# Altium PCB ShareBoard - i.MXRT1050_REV3.PcbDoc (part 3 of 3)
Units mil, origin at the board's own origin, x right, y up, seen from the top; angles counter-clockwise.
Board outline 1968.5 x 1968.5 mil, 4 copper layers (Top Layer, GND, POWER, Bottom Layer), stack 30.635 mil thick; 194 components, 200 nets, 998 pads, 473 vias.
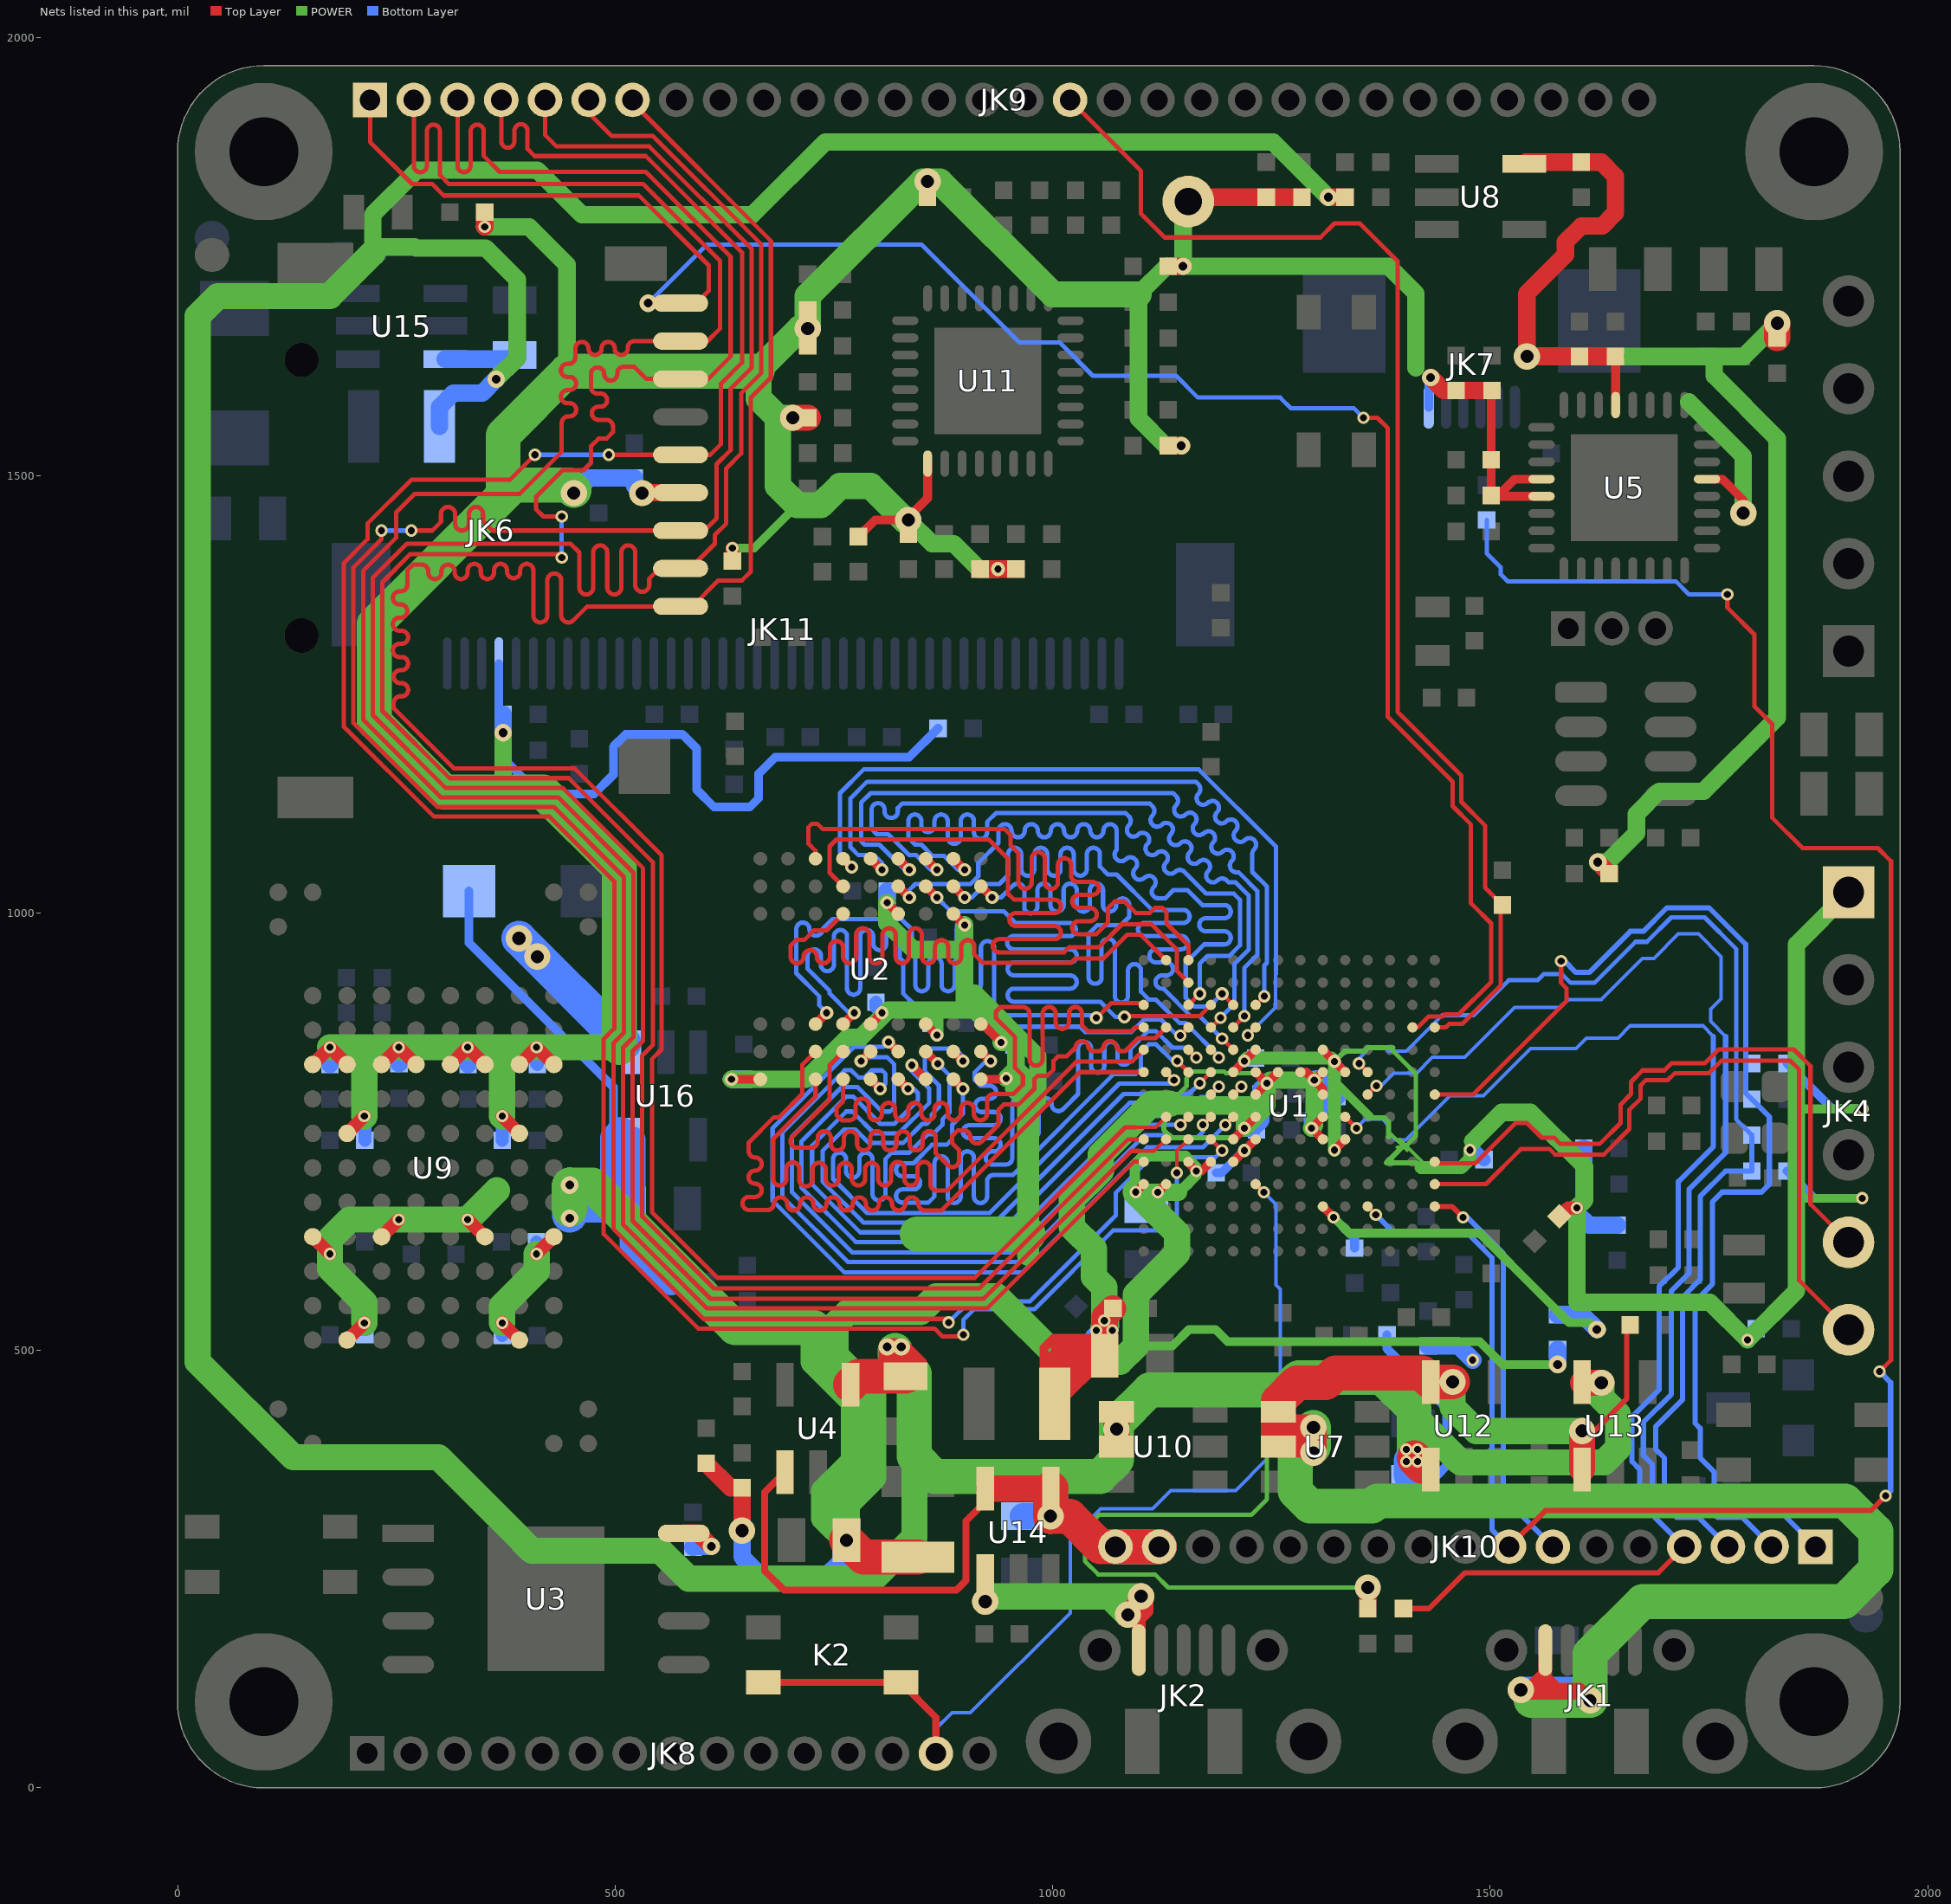
[diagram p5: the nets of this part, all layers, seen from the top]

## Via types
v1: diameter 14, hole 8, Top Layer to Bottom Layer, 293 vias
v2: diameter 20, hole 10, Top Layer to Bottom Layer, 69 vias
v3: diameter 15, hole 8, Top Layer to Bottom Layer, 53 vias
v4: diameter 30, hole 15, Top Layer to Bottom Layer, 52 vias
v5: diameter 16, hole 8, Top Layer to Bottom Layer, 3 vias
v6: diameter 40, hole 20, Top Layer to Bottom Layer, 2 vias
v7: diameter 50, hole 25, Top Layer to Bottom Layer, 1 vias

## Nets (pads, with @x,y where several pads share a name; then routed paths per layer and width w, separated by ;. In a path a pad name is that pad's centre, name@x,y a point inside that pad or via, vN(x,y) a via of type N, cw(c..) or ccw(c..) an arc to the next point about the centre after c; other vN are vias at no path point) (continued)
SDRAM_A12: U1.A3 U2.G1 | length 880.2
  Top Layer w5: U2.G1@729.01,1061.98 729.01,1070.99 721,1079 721,1098 725,1102 731,1102 737,1096 945,1096 952,1089 952,1077 961,1068 961,1035 ccw(c968.5,1035) 976,1035 976,1062 cw(c983.5,1062) 991,1062 991,1035 ccw(c998.5,1035) 1006,1035 1006,1055 cw(c1013.5,1055) 1021,1055 1021,1043 ccw(c1028.5,1043) 1029.88,1035.63 1045.37,1035.63 cw(c1045.37,1028.13) 1045.37,1020.63 1029.88,1020.63 ccw(c1029.88,1013.13) 1029.88,1005.63 1042.87,1005.63 cw(c1042.87,998.13) 1042.87,990.63 1029.88,990.63 ccw(c1029.88,983.13) 1029.88,975.63 1049.63,975.63 1063,989 1063,1005.23 1070.77,1013 1082,1013 1095,1000 1111,1000 1117,1006 1125,1006 1130,1001 1130,988 1155.18,962.82 U1.A3@1155.18,946
SDRAM_BA0: U1.C1 U2.G7 | length 882.9
  Top Layer w5: v3(1050,880) 1067,897 1101.82,897 U1.C1@1104,894.82
  Top Layer w10: U2.G7@729.01,873.01 v3(741.8,885.8)
  Bottom Layer w5: v3(741.8,885.8) 733,894.61 733,905 707,931 707,981.5 cw(c714.5,981.5) 722,981.5 ccw(c729.5,981.5) 737,981.5 748.5,993 827,993 839,981 839,957 843,953 843,918 ccw(c850.5,918) 858,918 858,942 cw(c865.5,942) 873,942 873,918 ccw(c880.5,918) 888,918 888,942.5 cw(c895.5,942.5) 903,942.5 903,918 ccw(c910.5,918) 918,918 918,960.3 cw(c925.5,960.3) 933,960.3 933,895 945,883 1047,883 v3(1050,880)
SDRAM_BA1: U1.F1 U2.G8 | length 880.4
  Top Layer w5: U2.G8@729.01,841.51 714,826.5 714,793 687.5,766.5 681.5,766.5 652.5,737.5 652.5,728.02 ccw(c660,728.02) 660,720.52 cw(c660,713.02) 660,705.52 ccw(c660,698.02) 660,690.52 cw(c660,683.02) 660,675.52 653,675.52 ccw(c653,668.02) 653,660.52 674,660.52 ccw(c674,668.02) 681.48,667.48 cw(c688.98,667.48) 696.48,667.48 ccw(c703.98,667.48) 711.48,667.48 cw(c718.98,667.48) 726.48,667.48 ccw(c733.98,667.48) 741.48,667.48 cw(c748.98,667.48) 756.48,667.48 ccw(c763.98,667.48) 771.48,667.48 cw(c778.98,667.48) 786.48,667.48 ccw(c793.98,667.48) 801.48,667.48 cw(c808.98,667.48) 816.48,667.48 ccw(c823.98,667.48) 831.48,667.48 cw(c838.98,667.48) 846.48,667.48 ccw(c853.98,667.48) 853.45,660 873,660 1031.05,818.05 U1.F1@1104,818.05
SDRAM_C\A\S\: U1.D3 U2.F7 | length 880
  Top Layer w5: v1(1146,860) U1.D3@1155.18,869.23
  Top Layer w10: U2.F7@760.5,873.01 v3(773.3,885.8)
  Bottom Layer w5: v3(773.3,885.8) 767.2,885.8 745,908 745,911 720,936 720,951 cw(c727.5,951) 735,951 735,941 ccw(c742.5,941) 750,941 750,973 cw(c757.5,973) 765,973 765,914 ccw(c772.5,914) 780,914 780,973 cw(c787.5,973) 795,973 795,965 ccw(c802.5,965) 810,965 810,974 cw(c817.5,974) 825,974 825,949 829,945 829,908 841,896 914,896 940,870 1031,870 1037,864 1090,864 1104,878 1124,878 1142,860 v1(1146,860)
SDRAM_C\S\: U1.E1 U2.G9 | length 880.2
  Top Layer w5: 695.5,695 695.5,707.4 cw(c703,707.4) 710.5,707.4 710.5,695 ccw(c718,695) 725.5,695 725.5,707 cw(c733,707) 740.5,707 740.5,696 ccw(c748,696) 755.5,696 755.5,707 cw(c763,707) 770.5,707 770.5,696 ; 695.5,696 cw(c688,696) 680.5,696 680.5,741.5 729.01,790.01 U2.G9@729.01,810.02 ; 770.5,695 770.5,696 ; 785.5,695 785.5,707 cw(c793,707) 800.5,707 800.5,696 ccw(c808,696) 815.5,696 ; 785.5,696 cw(c778,696) 770.5,696 ; 815.5,695 815.5,708 cw(c823,708) 830.5,708 830.5,696 ccw(c838,696) 845.5,696 845.5,708 cw(c853,708) 860.5,708 860.5,690 ccw(c868,690) 868.47,682.51 879.51,682.51 1027,830 1090.36,830 U1.E1@1104,843.64
SDRAM_CKE: U1.A2 U2.F3 | length 880.3
  Top Layer w5: U2.F3@760.5,998.99 741.51,980 727,980 716,969 707,969 700.5,962.5 700.5,950 ccw(c708,950) 715.5,950 cw(c723,950) 730.5,950 ccw(c738,950) 745.5,950 745.5,960.5 cw(c753,960.5) 760.5,960.5 760.5,950 ccw(c768,950) 775.5,950 775.5,975 cw(c783,975) 790.5,975 790.5,950 ccw(c798,950) 805.5,950 805.5,975 cw(c813,975) 820.5,975 820.5,950 ccw(c828,950) 835.5,950 835.5,975 cw(c843,975) 850.5,975 850.5,950 ccw(c858,950) 865.5,950 865.5,961.5 cw(c873,961.5) 880.5,961.5 880.5,950 ccw(c888,950) 895.5,950 895.5,961.5 cw(c903,961.5) 910.5,961.5 910.5,952.5 920,943 1021,943 1026,948 1058,948 1085,975 1100.59,975 U1.A2@1129.59,946
SDRAM_CLK: U1.B3 U2.F2 | length 880.8
  Top Layer w5: U2.F2@760.5,1030.49 745,1045.99 745,1076 753,1084 927,1084 949,1062 949,1022 956,1015 1002,1015 cw(c1002,1007.5) 1002,1000 958,1000 ccw(c958,992.5) 958,985 1002,985 cw(c1002,977.5) 1002,970 939,970 ccw(c939,962.5) 939,955 1013,955 1019,961 1053,961 1079,987 1113,987 1142,958 1142,933.59 U1.B3@1155.18,920.41
SDRAM_D0: U1.E3 U2.A8 | length 870.2
  Top Layer w5: U1.E3@1155.18,843.64 v1(1164.3,834.52)
  Top Layer w10: U2.A8@917.98,841.51 v3(928.99,830.5)
  Bottom Layer w5: v3(928.99,830.5) 923.5,830.5 911,818 911,809 917.49,802.51 928,802.51 cw(c928,795.01) 928,787.51 919,787.51 ccw(c919,780.01) 919,772.51 933,772.51 cw(c933,765.01) 933,757.51 905,757.51 ccw(c905,750.01) 905,742.51 933,742.51 cw(c933,735.01) 933,727.51 931,727.51 ccw(c931,720.01) 931,712.51 946.97,712.51 ccw(c946.5,720) 954,720 954,781 cw(c961.5,781) 969,781 969,750 ccw(c976.5,750) 984,750 984,781 cw(c991.5,781) 999,781 ccw(c1006.5,781) 1012.36,776.31 1029,792.96 1029,845 cw(c1036.5,845) 1044,845 1044,825 ccw(c1051.5,825) 1059,825 1059,845 cw(c1066.5,845) 1074,845 1074,834 ccw(c1081.5,834) 1089,834 1089,845 1109,865 1118,865 1137,846 1152.82,846 v1(1164.3,834.52)
SDRAM_D1: U1.F3 U2.B9 | length 880.5
  Top Layer w5: v1(1142.39,830.84) U1.F3@1155.18,818.05
  Top Layer w10: U2.B9@886.49,810.02 v3(897.5,799.01)
  Bottom Layer w5: 895,721 895,720 ; v3(897.5,799.01) 897.5,770.5 885,758 885,741 879,735 862,735 841,714 828.5,714 ccw(c828.5,706.5) 828.5,699 841,699 cw(c841,691.5) 841,684 828.5,684 ccw(c828.5,676.5) 828.5,669 858,669 865,676 865,714.5 cw(c872.5,714.5) 880,714.5 880,676 ccw(c887.5,676) 895,676 895,720 ; 910,721 910,720 ; v1(1142.39,830.84) 1137.16,830.84 1118,850 1110,850 1101,841 1101,822 1095,816 1070,816 954.48,700.48 931.97,700.48 ccw(c932.5,693) 925,693 925,676 cw(c917.5,676) 910,676 910,720 ; 895,720 cw(c902.5,720) 910,720
SDRAM_D2: U1.F4 U2.B8 | length 878
  Top Layer w5: v1(1167.98,805.25) U1.F4@1180.77,818.05
  Top Layer w10: U2.B8@886.49,841.51 v3(897.5,830.5)
  Bottom Layer w5: v3(897.5,830.5) 897.5,835.5 888,845 859,845 853.79,839.79 853.79,819.21 870,803 870,778 862,770 862,765 856,759 851,759 829,737 790,737 774.36,752.64 761.64,752.64 737,728 737,693 784,646 934,646 1081,793 1155.72,793 v1(1167.98,805.25)
SDRAM_D3: U1.G4 U2.C9 | length 862.5
  Top Layer w5: U1.G4@1180.77,792.46 v1(1189.89,801.57)
  Top Layer w10: v3(839,826) U2.C9@854.99,810.02
  Bottom Layer w5: v3(839,826) 839,819 859,799 859,783 824,748 796,748 771,773 764,773 725,734 725,690 780,635 940,635 1088,783 1163,783 1169.34,789.34 1177.66,789.34 v1(1189.89,801.57)
SDRAM_D4: U1.F2 U2.C8 | length 879.9
  Top Layer w5: U1.F2@1129.59,818.05 v1@1138.8,808.84
  Top Layer w10: U2.C8@854.99,841.51 v3(868.75,827.75)
  Bottom Layer w5: v3(868.75,827.75) 882,814.5 882,772 874,764 874,758 863,747 857,747 836,726 816,726 809,719 809,679 cw(c801.5,679) 794,679 794,718.5 ccw(c786.5,718.5) 779,718.5 779,705 cw(c771.5,705) 764,705 764,718.5 ccw(c756.5,718.5) 749,718.5 749,696 788,657 928,657 1076,805 v1@1136,805
  other v1: 1138.7,808.93
SDRAM_D5: U1.G5 U2.D9 | length 887
  Top Layer w5: U1.G5@1206.36,792.46 v1(1215.48,801.57)
  Top Layer w10: U2.D9@823.5,810.02 v3(834.5,799.01)
  Bottom Layer w5: v3(834.5,799.01) 840.99,799.01 846,794 846,786 819,759 803,759 772,790 764,790 713,739 713,686 775,624 947,624 1096,773 1103,773 1108,768 1131,768 1136,773 1168,773 1172,777 1190.91,777 v1(1215.48,801.57)
SDRAM_D6: U1.H5 U2.D8 | length 905.9
  Top Layer w5: v1(1197.25,757.75) U1.H5@1206.36,766.87
  Top Layer w10: v3(812.49,852.52) U2.D8@823.5,841.51
  Bottom Layer w5: v3(812.49,852.52) 806.97,847 773,847 680,754 680,671 762,589 965,589 1108,732 1171.5,732 v1(1197.25,757.75)
SDRAM_D7: U1.H4 U2.E9 | length 860.6
  Top Layer w5: v1(1171.66,757.75) U1.H4@1180.77,766.87
  Top Layer w10: U2.E9@792,810.02 v3(803.01,799.01)
  Bottom Layer w5: v3(803.01,799.01) 809,805 809,816 805,820 793,820 785,812 778,812 769.86,820.14 762.14,820.14 691,749 691,676 766,601 960,601 1105,746 1134,746 1137,743 1165,743 1171.66,749.66 v1(1171.66,757.75)
SDRAM_D8: U1.C6 U2.E1 | length 875.9
  Top Layer w4: U1.C6@1231.95,894.82 v1(1241.82,904.68)
  Top Layer w10: U2.E1@792,1061.98 v3(804.8,1049.19)
  Bottom Layer w5: v3(804.8,1049.19) 804.8,1057.2 796,1066 778,1066 769,1075 769,1131 788,1150 1163.6,1150 1166.83,1146.76 cw(c1161.3,1141.7) 1166.61,1136.39 ccw(c1171.91,1131.09) 1177.21,1125.79 cw(c1182.52,1120.48) 1187.82,1115.18 ccw(c1193.12,1109.88) 1198.43,1104.57 cw(c1203.73,1099.27) 1209.03,1093.97 ccw(c1214.34,1088.66) 1219.64,1083.36 cw(c1224.94,1078.06) 1230.25,1072.75 ccw(c1235.55,1067.45) 1228.06,1067.06 1228.06,1046.94 1244.75,1030.25 1244.75,943 1241.82,940.07 v1(1241.82,904.68)
SDRAM_D9: U1.C5 U2.D2 | length 880.8
  Top Layer w5: v3(1193.57,907.61) U1.C5@1206.36,894.82
  Top Layer w10: U2.D2@823.5,1030.49 v3(836.29,1017.69)
  Bottom Layer w5: v3(836.29,1017.69) 836.29,1026.29 843,1033 906,1033 915,1042 915,1057 938,1080 938,1094 cw(c945.5,1094) 953,1094 ccw(c960.5,1094) 968,1094 cw(c975.5,1094) 983,1094 ccw(c990.5,1094) 998,1094 cw(c1005.5,1094) 1013,1094 ccw(c1020.5,1094) 1028,1094 cw(c1035.5,1094) 1043,1094 ccw(c1050.5,1094) 1058,1094 cw(c1065.5,1094) 1073,1094 1073,1072 ccw(c1078.3,1066.7) 1083.61,1061.39 cw(c1088.91,1056.09) 1094.21,1050.79 ccw(c1099.52,1045.48) 1104.82,1040.18 cw(c1110.12,1034.88) 1115.43,1029.57 ccw(c1120.73,1024.27) 1120.25,1016.79 1128.79,1016.79 1138,1026 1154,1026 1171,1009 1196,1009 cw(c1196,1001.5) 1196,994 1175,994 ccw(c1175,986.5) 1175,979 1196,979 cw(c1196,971.5) 1196,964 1173,964 1152,943 1152,903 1162,893 1178.95,893 v3(1193.57,907.61)
SDRAM_D10: U1.D5 U2.D1 | length 868
  Top Layer w5: U1.D5@1206.36,869.23 v1(1219.16,882.02)
  Top Layer w10: U2.D1@823.5,1061.98 v3(836.29,1049.19)
  Bottom Layer w5: v3(836.29,1049.19) 830.81,1049.19 802,1078 785,1078 781,1082 781,1126 792,1137 1137.6,1137 1141.23,1133.37 cw(c1135.7,1128.3) 1141,1123 ccw(c1146.3,1117.7) 1151.61,1112.39 cw(c1156.91,1107.09) 1162.21,1101.79 ccw(c1167.52,1096.48) 1172.82,1091.18 cw(c1178.12,1085.88) 1183.43,1080.57 ccw(c1188.73,1075.27) 1194.03,1069.97 cw(c1199.34,1064.66) 1204.64,1059.36 ccw(c1209.94,1054.06) 1209.98,1046.56 1212.44,1046.56 1234,1025 1234,952 1219.16,937.16 v1(1219.16,882.02)
SDRAM_D11: U1.C4 U2.C2 | length 880.6
  Top Layer w5: v3@1082,882 1167.95,882 U1.C4@1180.77,894.82
  Top Layer w10: U2.C2@854.99,1030.49 v3(867.79,1017.69)
  Bottom Layer w5: v3(867.79,1017.69) 883.48,1002 944,1002 957.5,988.5 1019,988.5 cw(c1019,981) 1019,973.5 955.5,973.5 ccw(c955.5,966) 955.5,958.5 1020,958.5 cw(c1020,951) 1020,943.5 956,943.5 ccw(c956,936) 956,928.5 1020.5,928.5 ; 1020,928.5 cw(c1020,921) 1020,913.5 956,913.5 ccw(c956,906) 956,898.5 1054.5,898.5 1072,881 v3(1082,881)
SDRAM_D12: U1.D4 U2.C1 | length 868.7
  Top Layer w5: U1.D4@1180.77,869.23 1181.23,869.23 v1(1192,880)
  Top Layer w10: U2.C1@854.99,1061.98 v3(867.79,1049.19)
  Bottom Layer w5: v3(867.79,1049.19) 860.81,1049.19 844,1066 836,1066 812,1090 799,1090 793,1096 793,1118 cw(c800.5,1118) 808,1118 808,1116 ccw(c815.5,1116) 823,1116 823,1120 828,1125 1111,1125 1114.24,1121.76 cw(c1108.71,1116.7) 1114.01,1111.39 ccw(c1119.31,1106.09) 1124.62,1100.79 cw(c1129.92,1095.48) 1135.22,1090.18 ccw(c1140.53,1084.88) 1145.83,1079.57 cw(c1151.13,1074.27) 1156.44,1068.97 ccw(c1161.74,1063.66) 1167.04,1058.36 cw(c1172.35,1053.06) 1177.65,1047.75 ccw(c1182.95,1042.45) 1188.26,1037.15 cw(c1193.56,1031.84) 1199,1037 1201.01,1035 1209,1035 1224,1020 1224,958 1207.57,941.57 1207.57,896.02 v1@1193.57,882.02
SDRAM_D13: U1.E5 U2.B2 | length 880.9
  Top Layer w5: v1(1193.57,856.43) U1.E5@1206.36,843.64
  Top Layer w10: U2.B2@886.49,1030.49 v3(899.28,1017.69)
  Bottom Layer w5: v3(899.28,1017.69) 907.69,1017.69 923,1033 939,1033 949,1043 949,1067 cw(c956.5,1067) 964,1067 964,1050 ccw(c971.5,1050) 979,1050 979,1067 cw(c986.5,1067) 994,1067 994,1050 ccw(c1001.5,1050) 1009,1050 1009,1067 cw(c1016.5,1067) 1024,1067 1024,1050 ccw(c1031.5,1050) 1039,1050 1039,1067 cw(c1046.5,1067) 1054,1067 1054,1053 1063,1044 1073,1044 1113.5,1003.5 1149,1003.5 cw(c1149,996) 1149,988.5 1105,988.5 ccw(c1105,981) 1105,973.5 1147,973.5 cw(c1147,966) 1147,958.5 1119.5,958.5 ; 1118,958.5 ccw(c1118,951) 1118,943.5 1130,943.5 cw(c1130,936) 1130,928.5 1125,928.5 ccw(c1125,921) 1125,913.5 1126.5,913.5 1158,882 1168,882 v1(1193.57,856.43)
SDRAM_D14: U1.C3 U2.B1 | length 874.7
  Top Layer w5: U1.C3@1155.18,894.82 v3(1167.98,907.61)
  Top Layer w10: U2.B1@886.49,1061.98 v3(899.28,1049.19)
  Bottom Layer w5: v3(899.28,1049.19) 891.81,1049.19 876,1065 863,1065 850,1078 843,1078 835,1086 835,1105 cw(c842.5,1105) 850,1105 850,1100 ccw(c857.5,1100) 865,1100 865,1105 cw(c872.5,1105) 880,1105 880,1086.5 ccw(c887.5,1086.5) 895,1086.5 895,1105 cw(c902.5,1105) 910,1105 910,1092 ccw(c917.5,1092) 925,1092 925,1104 935,1114 1083.6,1114 1087.23,1110.37 cw(c1081.7,1105.3) 1087,1100 ccw(c1092.3,1094.7) 1097.61,1089.39 cw(c1102.91,1084.09) 1108.21,1078.79 ccw(c1113.52,1073.48) 1118.82,1068.18 cw(c1124.12,1062.88) 1129.43,1057.57 ccw(c1134.73,1052.27) 1140.03,1046.97 cw(c1145.34,1041.66) 1151.29,1046.22 1175.51,1022 1207,1022 1214,1015 1214,963 1202,951 1177,951 1167.98,941.98 v3(1167.98,907.61)
SDRAM_D15: U1.E4 U2.A2 | length 870.1
  Top Layer w5: U1.E4@1180.77,843.64 v1(1189.89,834.52)
  Top Layer w10: U2.A2@917.98,1030.49 v3(930.78,1017.69)
  Bottom Layer w5: v3(930.78,1017.69) 941.09,1017.69 954.7,1031.31 cw(c960,1026) 967.5,1026 967.5,1007 ccw(c975,1007) 982.5,1007 982.5,1026 cw(c990,1026) 997.5,1026 997.5,1009 ccw(c1005,1009) 1012.5,1009 1012.5,1026 cw(c1020,1026) 1027.5,1026 1027.5,1009 ccw(c1035,1009) 1042.5,1009 1042.5,1026 cw(c1050,1026) 1057.5,1026 1057.5,1009 ccw(c1065,1009) 1072.5,1009 cw(c1080,1009) 1087.5,1009 1087.5,995.5 1078,986 1051,986 1041,976 1041,926.5 ccw(c1048.5,926.5) 1056,926.5 1056,963 cw(c1063.5,963) 1071,963 1071,905 ccw(c1078.5,905) 1086,905 1086,934 cw(c1093.5,934) 1101,934 1101,910 1110,901 1118,901 1145,874 1152,874 1189.89,836.11 v1(1189.89,834.52)
SDRAM_DM0: U1.H3 U2.E8 | length 870.9
  Top Layer w5: v1(1146.07,757.75) U1.H3@1155.18,766.87
  Top Layer w10: v3(780.99,830.5) U2.E8@792,841.51
  Bottom Layer w5: v3(780.99,830.5) 785.49,835 811,835 819,827 819,778 814,773 805,773 777,801 759,801 702,744 702,681 771,612 954,612 1099.75,757.75 v1(1146.07,757.75)
SDRAM_DM1: U1.D6 U2.F1 | length 891.4
  Top Layer w5: v1(1222.86,860.14) U1.D6@1231.95,869.23
  Top Layer w10: U2.F1@760.5,1061.98 v3(770.24,1052.24)
  Bottom Layer w4: v1(1222.86,860.14) 1254.82,892.09 1254.82,930
  Bottom Layer w5: v3(770.24,1052.24) 757,1065.49 757,1137 784,1164 1167,1164 1255,1076 1255,930.18
SDRAM_R\A\S\: U1.D2 U2.F8 | length 881.1
  Top Layer w5: U2.F8@760.5,841.51 745,826.01 745,786.61 702.69,744.3 ccw(c708,739) 708,731.5 724,731.5 ccw(c724,739) 731.5,739 731.5,743 cw(c739,743) 746.5,743 746.5,736 ccw(c754,736) 761.5,736 761.5,743 cw(c769,743) 776.5,743 776.5,736 ccw(c784,736) 791.5,736 791.5,743 cw(c799,743) 806.5,743 806.5,736 ccw(c814,736) 821.5,736 821.5,743 cw(c829,743) 836.5,743 836.5,736 ccw(c844,736) 851.5,736 851.5,743 cw(c859,743) 866.5,743 866.5,725.48 879.56,712.43 ccw(c885.5,717) 893,717 893,729 885,737 885,745 891.37,751.37 899.88,751.37 cw(c898.5,744) 906,744 ccw(c913.5,744) 918.8,738.69 938,757.89 938,774.97 944.03,781 961,781 979,799 979,810 983,814 994,814 1001,821 1001,831 1006,836 1016,836 1026,846 cw(c1033.5,846) 1041,846 1045,842 1054,842 1058,846 cw(c1065.5,846) 1073,846 1077,842 1083,842 1097.82,856.82 1117.19,856.82 U1.D2@1129.59,869.23
SDRAM_W\E\: U1.D1 U2.F9 | length 880.4
  Top Layer w5: U2.F9@760.5,810.02 760.5,784.5 753,777 753,769 759,763 767.05,763 ccw(c767.47,770.49) 774.97,770.49 774.97,780.2 cw(c782.47,780.2) 789.97,780.2 789.97,770.49 ccw(c797.47,770.49) 804.97,770.49 804.97,775.49 cw(c812.47,775.49) 819.97,775.49 819.97,770.49 ccw(c827.47,770.49) 834.97,770.49 834.97,775.49 cw(c842.47,775.49) 849.97,775.49 849.97,770.49 ccw(c857.47,770.49) 864.97,770.49 864.97,775.49 cw(c872.47,775.49) 879.97,775.49 879.97,770.49 ccw(c887.47,770.49) 894.97,770.49 894.97,775.49 cw(c902.47,775.49) 909.97,775.49 909.97,770.49 ccw(c917.47,770.49) 924.97,770.49 924.97,785.49 cw(c932.47,785.49) 932.88,792.97 954.97,792.97 966,804 966,814 957,823 957,858 935,880 935,887 940.5,892.5 966,892.5 cw(c966,885) 973.5,885 973.5,833 ccw(c981,833) 988.5,833 988.5,885 cw(c996,885) 1003.5,885 1003.5,875 ccw(c1011,875) 1018.5,875 1018.5,885 cw(c1026,885) 1033.5,885 1033.5,871.5 1040,865 1090,865 1094.23,869.23 U1.D1@1104,869.23
SPI3_C\S\0\: JK10.3 U1.G11 | length 1271.1
  Top Layer w5: U1.G11@1359.91,792.46 v1(1369.82,802.37)
  Bottom Layer w4: v1(1369.82,802.37) 1375.37,802.37 1390,817 1416,817 1434,835 1471,835 1528,892 1579,892 1588,901 1627,901 1674,948 1687,948 1715,976 1738,976 1764,950 1764,902 1752,890 1752,876 1769,859
  Bottom Layer w6: 1769,859 1769,726 1727,684 1727,588 1707,568 1707,450 1675,418 1675,380 1685,370 1685,337 1713,309 1738.24,309 JK10.3@1771.65,275.59
SPI3_C\S\1\: JK10.2 R39.1 R53.1 U1.F11 | length 1384.8
  Top Layer w5: v1(1350,827.95) U1.F11@1359.91,818.05
  Bottom Layer w4: v1(1350,827.95) 1350,833.73 1362.27,846 1380,846 1384,842 1404,842 1442,880 ; 1442,880.02 1444.98,883
  Bottom Layer w5: 1444.98,883 1481,883 1521,923 1554,923 1561,930 1582,930 1592,920 1619,920 1666,967 1679,967 1707,995 1745,995 1781,959 1781,764 R39.1@1799,746
  Bottom Layer w6: R39.1@1799,746 R53.1@1799,705 1769,705 1740,676 1740,581 1720,561 1720,444 1689,413 1689,387 1699,377 1699,344 1721,322 1747,322 1760,309 1788.24,309 JK10.2@1821.65,275.59
SPI3_C\S\2\: JK10.1 R40.1 R54.1 U1.G14 | length 1360.3
  Top Layer w5: U1.G14@1436.68,792.46 1480.46,792.46 1587,899 1587,914 1581,920 v1(1581,945)
  Bottom Layer w6: v1(1581,945) 1585,945 1598,932 1613,932 1660,979 1675,979 1702,1006 1750,1006 1792,964 1792,794 R40.1@1799,787 1819,767 1819,690 1810,681 1765,681 1754,670 1754,576 1734,556 1734,417 1740,411 1740,377 1756,361 1756,332 1765,323 1824.24,323 JK10.1@1871.65,275.59
SPI3_MISO/LCD_R\S\T\: JK10.8 R58.2 U1.M11 | length 2471.7
  Top Layer w5: U1.M11@1359.91,664.5 v1(1369.25,655.16) ; v1(1771,1364) 1771,1349 1802,1318 1802,1236 1822,1216 1822,1109 1857,1074 1943,1074 1958,1059 1958,489 v1(1945,476)
  Top Layer w6: JK10.8@1521.65,275.59 1563.06,317 1935,317 v1(1952,334)
  Bottom Layer w5: R58.2@1496,1449 1496,1411 1512,1395 1512,1387 1520,1379 1712,1379 1727,1364 v1(1771,1364) ; v1@1771,1367 v1@1773,1367
  Bottom Layer w6: v1(1369.25,655.16) 1391.41,633 1444,633 1447,636 1472,636 1502,606 1502,295.24 JK10.8@1521.65,275.59 ; v1(1945,476) 1957.5,463.5 1957.5,339.5 v1(1952,334)
SPI3_MOSI/PWM2_B3: JK10.4 R5.1 U1.H10 | length 1511.5
  Top Layer w5: U1.H10@1334.32,766.87 v1(1347.11,754.07)
  Top Layer w6: R5.1@1401,205 1430,205 1471,246 1692.06,246 JK10.4@1721.65,275.59
  Bottom Layer w4: v1(1347.11,754.07) 1357.22,764.19 1376.81,764.19 1384,757 1384,748.31 1391.66,740.66 1403.66,740.66 1454,791 1492,791 1546,845 1598,845 1610,857 1646,857 1660,871 1743,871 1755,859
  Bottom Layer w6: 1693,489 1693,500 ; JK10.4@1721.65,275.59 1671,326.24 1671,364 1662,373 1662,424 1693,455 1693,500 ; 1755,859 1755,733 1715,693 1715,595 1693,573 1693,500
SPI3_SCK: JK10.7 U1.M14 | length 459.4
  Top Layer w6: U1.M14@1436.68,664.5 1456.5,664.5 v1(1469,652)
  Bottom Layer w6: v1(1469,652) 1474,652 1515,611 1515,332.24 JK10.7@1571.65,275.59
TF1_C\D\: JK6.9 JK9.1 U1.D13 | length 2350.8
  Top Layer w5: JK9.1@219.88,1929.13 219.88,1881.12 268,1833 291,1833 304,1820 527,1820 607,1740 607,1711 592.85,1696.85 JK6.9@574.8,1696.85 v2(537.85,1696.85) ; v1(1355,1566) 1371,1566 1383,1554 1383,1224 1457,1150 1457,1122 1478,1101 1478,1011 1501,988 1501,921 1464,884 1448,884 1445.63,881.63 1429.63,881.63 1417.23,869.23 U1.D13@1411.09,869.23
  Bottom Layer w5: v2(537.85,1696.85) 605,1764 850,1764 962,1652 1008,1652 1046,1614 1141,1614 1166,1589 1260,1589 1272,1577 1344,1577 v1(1355,1566)
TF1_CLK: JK6.5 JK9.4 U1.J3 | length 2994
  Top Layer w4: v1(1142,703) 1142,728.09 U1.J3@1155.18,741.28
  Top Layer w5: JK9.4@369.88,1929.13 369.88,1882.12 ccw(c377.38,1882.12) 384.88,1882.12 384.88,1893.88 cw(c392.38,1893.88) 399.88,1893.88 399.88,1873.12 408,1865 535,1865 645,1755 645,1629 621,1605 621,1536 608.62,1523.62 JK6.5@574.8,1523.62 v1(492.62,1523.62) ; v1(408.38,1523.62) 379.76,1495 267,1495 217,1445 217,1427 190,1400 190,1213 293,1110 425,1110 499,1036 499,868 487,856 487,633 595,525 865,525 874,516 896,516 v1(898,518)
  Bottom Layer w5: v1(408.38,1523.62) v1(492.62,1523.62) ; v1(898,518) 898,535 910,547 979,547 1069,637 1135,637 1142,644 v1(1142,703)
TF1_CMD: JK6.3 JK9.5 U1.J4 | length 2995.2
  Top Layer w5: v1(233,1437) 233,1427 201,1395 201,1217 297,1121 430,1121 510,1041 510,863 498,851 498,639 601,536 877,536 v1(881,532) ; v1(267,1437.01) 291.01,1437.01 301,1447 301,1456 cw(c309,1456) 317,1456 317,1445 ccw(c325,1445) 333,1445 333,1456 cw(c341,1456) 349,1456 349,1448 359.99,1437.01 JK6.3@574.8,1437.01 602.01,1437.01 616,1451 616,1513 632,1529 632,1599 656,1623 656,1759 539,1876 433,1876 419.88,1889.12 JK9.5@419.88,1929.13 ; U1.J4@1180.77,741.28 v1(1193.57,728.48)
  Bottom Layer w5: v1(233,1437) v1(267,1437.01) ; v1(881,532) 905,556 974,556 1072,654 1072,680 1113,721 1186.09,721 v1(1193.57,728.48)
TF1_D0: JK6.7 JK9.3 U1.J1 | length 2998
  Top Layer w5: JK9.3@319.88,1929.13 319.88,1854 ccw(c327.38,1854) 334.88,1854 334.88,1893.38 cw(c342.38,1893.38) 349.88,1893.38 349.88,1865.12 368,1847 535,1847 632,1750 632,1636 606.24,1610.24 JK6.7@574.8,1610.24 535.76,1610.24 521.67,1624.33 509.95,1624.33 ccw(c509.95,1616.83) 502.5,1616 cw(c495,1616) 487.5,1616 ccw(c480,1616) 472.5,1616 472.5,1601 ccw(c480,1601) 480.93,1593.56 483.43,1593.56 cw(c483.43,1586.06) 483.43,1578.56 480.93,1578.56 ccw(c480.93,1571.06) 480.93,1563.56 490,1563.56 cw(c490,1556.06) 497.5,1556 497.5,1549.5 490,1542 481,1542 472.5,1533.5 472.5,1514.5 464,1506 440,1506 409.65,1475.65 409.65,1461.35 418,1453 v1(439,1453) ; v1(439,1406) 435,1410 266,1410 234,1378 234,1231 311,1154 447,1154 543,1058 543,849 531,837 531,653 613,571 916,571 1086.28,741.28 U1.J1@1104,741.28
  Bottom Layer w5: v1(439,1406) v1(439,1453)
TF1_D1: JK6.8 JK9.2 U1.K1 | length 2995.1
  Top Layer w5: JK9.2@269.88,1929.13 269.88,1854 ccw(c277.38,1854) 284.88,1854 284.88,1893.38 cw(c292.38,1893.38) 299.88,1893.38 299.88,1843.12 310,1833 532,1833 620,1745 620,1668 605.54,1653.54 JK6.8@574.8,1653.54 521.96,1653.54 ccw(c521.95,1646.05) 514.5,1645.22 cw(c507,1645.22) 499.5,1645.22 ccw(c492,1645.22) 484.5,1645.22 cw(c477,1645.22) 469.5,1645.22 ccw(c462,1645.22) 454.5,1645.22 454.44,1645.16 454.44,1636 cw(c447,1635.07) 447,1627.57 445.5,1627.57 ccw(c445.5,1620.07) 445.5,1612.57 448,1612.57 cw(c448,1605.07) 448,1597.57 445.5,1597.57 ccw(c445.5,1590.07) 445.5,1582.57 448,1582.57 cw(c448,1575.07) 448,1567.57 446.5,1567.57 ccw(c446.5,1560.07) 439,1560 439,1527 391,1479 271,1479 250,1458 250,1429 212,1391 212,1221 301,1132 435,1132 521,1046 521,858 509,846 509,644 605,548 925,548 1092.68,715.68 U1.K1@1104,715.68
TF1_D2: JK6.1 JK9.7 U1.H2 | length 3009.2
  Top Layer w4: 1095,754.96 1117.69,754.96 U1.H2@1129.59,766.87
  Top Layer w5: JK9.7@519.88,1929.13 519.88,1926.12 678,1768 678,1612 655,1589 655,1390 645,1380 618,1380 588.39,1350.39 JK6.1@574.8,1350.39 468.2,1350.39 452.35,1334.54 cw(c446.5,1340) 438.5,1340 438.5,1380 ccw(c430.5,1380) 422.5,1380 422.5,1340 cw(c414.5,1340) 406.5,1340 406.5,1391.5 ccw(c399,1391.5) 391.5,1391.5 391.5,1390 cw(c384,1390) 376.5,1390 376.5,1391.5 ccw(c369,1391.5) 361.5,1391.5 361.5,1389 cw(c354,1389) 346.5,1389 346.5,1391.5 ccw(c339,1391.5) 331.5,1391.5 331.5,1389 cw(c324,1389) 316.5,1389 316.5,1390.5 ccw(c309,1390.5) 301.5,1390.5 301.5,1389 cw(c294,1389) 286.5,1389 286.5,1390.5 ccw(c279,1390.5) 279,1398 269,1398 262.45,1391.45 262.45,1375.83 cw(c255,1375) 255,1367.5 253.5,1367.5 ccw(c253.5,1360) 253.5,1352.5 255,1352.5 cw(c255,1345) 255,1337.5 253.5,1337.5 ccw(c253.5,1330) 253.5,1322.5 256,1322.5 cw(c256,1315) 256,1307.5 253.5,1307.5 ccw(c253.5,1300) 253.5,1292.5 256,1292.5 cw(c256,1285) 256,1277.5 254.5,1277.5 ccw(c254.5,1270) 254.5,1262.5 256,1262.5 cw(c256,1255) 256,1247.5 254.5,1247.5 ccw(c254.5,1240) 247,1240 247,1234 316,1165 454,1165 553,1066 553,844 542,833 542,658 617,583 911,583 1082.96,754.96 1095,754.96
TF1_D3: JK6.2 JK9.6 U1.J2 | length 2984.2
  Top Layer w4: 1098,728 1116.32,728 U1.J2@1129.59,741.28
  Top Layer w5: JK9.6@469.88,1929.13 469.88,1914.12 496,1888 543,1888 667,1764 667,1617 644,1594 644,1525 627,1508 627,1445 614,1432 614,1422 585.7,1393.7 JK6.2@574.8,1393.7 550.7,1393.7 539,1382 539,1375 cw(c531,1375) 523,1375 523,1412 ccw(c515,1412) 507,1412 507,1372 cw(c499,1372) 491,1372 491,1412 ccw(c483,1412) 475,1412 475,1372 cw(c467,1372) 459,1372 459,1412 449,1422 262,1422 223,1383 223,1226 306,1143 440,1143 532,1051 532,854 520,842 520,648 609,559 921,559 1090,728 1098,728
UART1_RX: JK4.6 U1.L14 | length 826.2
  Top Layer w5: U1.L14@1436.68,690.09 1495.09,690.09 1535,730 1568,730 1574,724 1630,724 1659,753 1659,775 1672,788 1672,803 1678,809 1703,809 1711,817 1750,817 1764,831 1843,831 1853,821 1853,580.07 JK4.6@1909.45,523.62
UART1_TX: JK4.5 U1.K14 | length 751.5
  Top Layer w5: U1.K14@1436.68,715.68 1438.36,714 1483,714 1529,760 1542,760 1559,743 1573,743 1580,736 1625,736 1649,760 1649,781 1661,793 1661,807 1674,820 1699,820 1707,828 1745,828 1761,844 1847,844 1866,825 1866,667.07 JK4.5@1909.45,623.62
VA3.3: C31.1 C40.2 C41.1 R1.2 R9.2 U5.21 U8.5 | length 1595.3
  Top Layer w10: C40.2@1643.16,1635 1643.31,1634.85 U5.21@1643.31,1580.5
  Top Layer w20: U8.5@1539,1856 1541,1858 C41.1@1604,1858 1627,1858 1643,1842 1643,1800 1628,1785 1604,1785 1586,1767 1586,1752 1542,1708 v4(1542,1636) C31.1@1602.16,1636 C40.2@1643.16,1636 ; v2(1623,1058) R9.2@1636,1045
  Top Layer w30: R1.2@1828,1657 v4(1828,1674)
  POWER w20: v4(1542,1636) 1756,1636 ; v2(1623,1058) 1634,1058 1667,1091 1667,1113 1693,1139 1744,1139 1828,1223 1828,1542 1756,1614 1756,1636 ; v4(1828,1674) 1790,1636 1756,1636
VD1.2: C5.2 C32.2 C33.2 C34.2 C35.2 C36.2 L3.2 U1.F6 U1.F7 U1.F8 U1.F9 U1.G6 U1.G9 U1.H6 U1.H9 U1.J5 U1.J9 | length 1680.2
  Top Layer w10: L3.2@1002.31,439 990,451.31 990,503 1001,514 1039.5,514 ; U1.J5@1206.36,741.28 v3(1219.16,754.07) U1.H6@1231.95,766.87 ; U1.G6@1231.95,792.46 v3(1244.75,805.25) ; U1.F6@1231.95,818.05 v3(1244.75,805.25) ; U1.F7@1257.54,818.05 v3(1244.75,805.25) ; U1.F8@1283.13,818.05 1289.95,818.05 v3(1299,809) ; U1.J9@1308.72,741.28 v3(1295.93,754.07) U1.H9@1308.72,766.87 ; U1.G9@1308.72,792.46 1308.72,799.28 v3(1299,809) ; U1.F9@1308.72,818.05 v3(1299,809)
  Top Layer w30: 1013,494 1002.31,483.31 1002.31,448.31 1048,494 C5.2@1059.5,494 1059.5,538.5 C34.2@1069,548 ; 1013,504 C5.2@1048,504
  POWER w5: 1110,793 1144,793 1153,802 1153,811 1161,819 1162,819 1175,819 1196,819 1198,817 1233,817 v3(1244.75,805.25)
  POWER w6: 1127,780 1127,752 1136,743 1181,743 ; 1170,743 1181,743 ; v3(1219.16,754.07) 1208.09,743 1181,743
  POWER w20: 1219.16,769.84 v3(1219.16,754.07) 1227.04,761.96 1244.75,779.66 v3(1244.75,805.25) 1248.5,809 v3(1299,809) 1299,757.14 v3(1295.93,754.07)
  POWER w21: 1127,780 1209,780 ; 1191,780 1209,780 ; 1219,770 1209,780 ; v3(1244.75,805.25) 1244.75,795 1229.75,780 1209,780
  POWER w30: 1058,525 1061,528 v1@1061,540 ; v1(1059,534) 1059,572 1047,584 1047,616 1022,641 1022,672 1055,705 1055,724 1111,780 ; 1113.45,782 1134,782
  Bottom Layer w20: C36.2@1047,516 v1@1061.5,530.5 ; C36.2@1055.14,521.86 1056.28,523 C36.2@1065,523 ; v3(1219.16,754.07) 1228.93,754.07 1238,763.14 C33.2@1238,793 1238,798.5 v3(1244.75,805.25) ; v3@1297,754.07 1297,767 C35.2@1315.8,785.8 ; v3@1300.4,810.4 1304.6,810.4 C35.2@1325,790
  other v1: 1050,523 1068,523
VD3.0: C6.2 C25.2 C26.2 C42.2 C86.1 D2.2 L1.2 R7.1 R14.2 R61.1 U1.K3 U1.K4 U1.L1 U1.L2 U16.5 | length 3501.9
  Top Layer w10: v1(1094.91,681) U1.L1@1104,690.09 ; v1(1120.25,680.75) U1.L2@1129.59,690.09 ; U1.K3@1155.18,715.68 1155.18,713.82 v1(1164,705) 1170.09,705 U1.K4@1180.77,715.68
  Top Layer w20: R7.1@604,371 632,343 ; v4(645,294) C42.2@645,343
  Top Layer w40: v4(764.5,283) 783.8,263.69 L1.2@846,263.69
  POWER w10: 1095,505 1137,505 1156,524 1186,524 1200,510 1488,510 1514,484 v2(1577,484)
  POWER w12: v1(1094.91,681) 1094,681.91 1094,713 1103,722 1152,722 1164,710 v1(1164,705) v1@1164,700.96 ; 1143.75,680.75 1144.71,680.75 v1@1164,700.04
  POWER w20: v1@1095.15,680.75 v1(1120.25,680.75) 1143.75,680.75
  POWER w30: 727,526 727,487 773,441 773,373 739,339 739,308.5 v4(764.5,283) 764.5,324.5 795,355 795,451 752,494 752,530 766,544 849,544 867,562 936,562 1011,487 1077,487 1095,505 1095,564 1142,611 1142,634 v1@1095,681
  POWER w40: 448,661 v2(448,689) 474,689 637,526 727,526
  Bottom Layer w10: D2.2@333,1025 333,966 498,801 498,743
  Bottom Layer w15: C6.2@1094.91,673.59 v1(1094.91,681)
  Bottom Layer w20: v4(645,294) 645,264 674,235 734,235 764.5,265.5 v4(764.5,283) ; C6.2@1094.91,673.59 1102.07,680.75 v1(1120.25,680.75) 1120.25,674.74 C6.2@1107,661.5 ; v2(1577,484) R14.2@1577,501
  Bottom Layer w30: v2(448,651) 459,662 ; 507,752 498,743 498,676 512,662 C86.1@519.5,662 ; U16.5@520,741 520,622 R61.1@564,578
  Bottom Layer w40: v2@448,654.84 v2(448,689) ; 459,666 C86.1@512,666
VD5.0: C24.2 C60.2 C61.1 C69.2 JK10.16 JK10.17 L2.1 R3.1 R60.1 U4.1 U4.4 U10.4 U10.5 U12.1 U13.5 U14.4 U14.5 U15.6 | length 6767.3
  Top Layer w8: U4.1@694,361 671,338 671,248 693,226 890,226 901,237 901,305 923,327 U14.5@923,342
  Top Layer w20: 811,491.5 v2(811,504) v2(827,504) 847,484 C24.2@847,468 ; 822,492 C24.2@843,471 ; v2(1315,1818) R3.1@1334,1818
  Top Layer w30: U14.5@928,342 U14.4@993,342 ; 975,342 U14.4@993,342 ; U14.4@1000,342 U14.4@998,342 U14.4@993,342 ; U10.5@1073,393 v4(1073,410) U10.4@1073,427 ; U13.5@1606,463 v4(1627,463)
  Top Layer w40: U4.4@769,461 778.5,470.5 C24.2@832,470.5 ; U14.4@998,342 997.5,341.5 v4(997.5,310.5) 1019.5,310.5 1054.41,275.59 JK10.17@1071.65,275.59 JK10.16@1121.65,275.59 ; v1@1413,377 U12.1@1422,368
  POWER w10: 1342,470 1343,469
  POWER w20: v2(364,1610) 388,1634 388,1724 352,1760 272,1760 271,1761 223,1761 223,1798 274,1849 411,1849 462,1798 657,1798 740,1881 1252,1881 v2(1315,1818)
  POWER w30: 223,1754 174,1705 46,1705 23,1682 23,487 132,378 298,378 381,295 405,271 552,271 584,239 642,239 730,239 795,239 842,286 842,379 ; 997.5,355.5 998,356 ; 1413,425 1466,372 1630,372 1646,388 1646,427 1627,446 v4(1627,463)
  POWER w40: v2@820,500 820,495 842,473 842,379 865,356 1054,356 1073,375 v4(1073,410) 1073,417 1111,455 1267,455 1281,469 1377,469 1413,433 1413,425 v1@1413,383 ; v4(997.5,310.5) 997.5,355.5
  Bottom Layer w10: R60.1@1382,518 1382,502 1434,450 1450,434 1450,368 1440,358 C60.2@1410,358
  Bottom Layer w20: L2.1@299.31,1556 299.31,1578.31 315,1594 348,1594 v2(364,1610) 385,1631 C69.2@385,1637.5 380.5,1633 U15.6@306,1633
  Bottom Layer w30: C61.1@966,310.5 v4(997.5,310.5)
  Bottom Layer w40: JK10.17@1071.65,275.59 JK10.16@1121.65,275.59 ; C60.2@1410,358 v1@1410,374
  other v1: 1404,373 1417,373 1404,387 1417,387
VDIO: C7.1 C9.2 C10.2 C16.1 C17.2 C18.2 C22.1 C23.1 C30.2 C37.1 C38.2 C39.1 C54.1 C56.1 C57.1 C58.2 C62.2 C63.2 C64.2 C65.2 C66.2 C67.2 C68.2 C73.1 C74.1 C75.2 C76.2 C77.2 C78.2 C79.1 C80.2 C81.2 C82.2 C83.2 C84.2 FB1.2 FB2.2 FB3.2 JK4.1 JK6.4 JK7.1 JK11.37 pad.@1155,1813 R4.2 R13.2 R19.1 R22.1 R25.2 R27.1 R28.1 R30.1 R31.1 R32.2 R53.2 R54.2 R55.2 R56.2 R62.1 R63.1 U1.E6 U1.E9 U1.F5 U1.F10 U1.J6 U1.J10 U1.K5 U2.A7 U2.A9 U2.B3 U2.C7 U2.D3 U2.E7 U2.J9 U3.8 U5.13 U5.28 U5.29 U9.F2 U9.F3 U9.F4 U9.F5 U9.F6 U9.F7 U9.F8 U9.F9 U9.H3 U9.H8 U9.L2 U9.L4 U9.L7 U9.L9 U9.P3 U9.P8 U11.17 U16.1 | length 11287.6
  Top Layer w10: v3(633,810) U2.J9@666.02,810.02 ; R55.2@634,1402 v1(634,1417) ; R56.2@778,1430 797,1449 v4(835,1449) 835,1452 857.09,1474.09 U11.17@857.09,1513.5 ; U2.E7@792,873.01 v3(804.8,885.8) ; v3(810.7,1011.79) U2.D3@823.5,998.99 ; U2.C7@854.99,873.01 v3(867.79,860.21) ; U2.B3@886.49,998.99 v3(899.28,986.2) ; U2.A9@917.98,810.02 946.02,810.02 v3(947,811) ; U2.A7@917.98,873.01 919.99,873.01 v3(941,852) ; U1.K5@1206.36,715.68 v3(1219.16,728.48) U1.J6@1231.95,741.28 ; U1.F5@1206.36,818.05 v1(1219.16,830.84) U1.E6@1231.95,843.64 ; U1.E9@1308.72,843.64 v3(1322,830.36) U1.F10@1334.32,818.05 ; v1(1322.04,729) U1.J10@1334.32,741.28 ; C57.1@1502,1597 1501.16,1596.15 C30.2@1501.16,1518 C39.1@1501.16,1477 1502,1476.15 U5.29@1558.66,1476.15 ; C39.1@1509.16,1477 1528,1495.85 U5.28@1558.66,1495.85 ; U5.13@1747.66,1495.85 1765.31,1495.85 1789.16,1472 v4(1789.16,1457)
  Top Layer w15: U9.L2@154.37,629.92 v1(174.05,610.24) ; U9.F2@154.37,826.77 v1(174.05,846.46) U9.F3@193.74,826.77 ; U9.P3@193.74,511.81 v1(213.43,531.5) ; U9.H3@193.74,748.03 v1(213.43,767.72) ; U9.L4@233.11,629.92 v1(252.8,649.61) ; U9.F4@233.11,826.77 v1(252.8,846.46) U9.F5@272.48,826.77 ; U9.F6@311.85,826.77 v1(331.53,846.46) U9.F7@351.22,826.77 ; v1(331.53,649.61) U9.L7@351.22,629.92 ; v1(370.91,531.5) U9.P8@390.59,511.81 ; v1(370.91,767.72) U9.H8@390.59,748.03 ; U9.F8@390.59,826.77 v1(410.28,846.46) U9.F9@429.96,826.77 ; v1(410.28,610.24) U9.L9@429.96,629.92 ; R55.2@634,1402 v1(634,1417) ; FB1.2@1579.14,653.14 1589,663 v1(1599,663)
  Top Layer w20: v1(351,1784) R13.2@351,1801 ; v4(530.77,1479.77) 531.32,1480.31 JK6.4@574.8,1480.31 ; U3.8@578.48,291 595,291 v2(610,276) ; R19.1@917,1393 v5(937.5,1393) R27.1@958,1393 ; R25.2@1132,1534 v2(1147,1534) ; R28.1@1132,1739 v2(1149,1739) ; pad.@1155,1813 1160,1818 R62.1@1244,1818 R63.1@1285,1818 ; v2(1432,1612) 1447,1597 C58.2@1461,1597 C57.1@1502,1597
  Top Layer w30: v4(703,1566) R22.1@720,1566
  POWER w4: 1385.29,748.69 1405,728.98 ; 1393.98,732 1402,732 ; 1396.93,741.07 1429,709
  POWER w5: 1386,845 1415,816 1415,745 1405,735
  POWER w6: v3(1322,830.36) 1333.64,842 1356,842 1360,846 1388.93,846 ; 1360.34,765.66 1379.34,765.66 1383.82,761.18 1383.82,744.18 ; 1381.48,714.48 1398,731 ; 1384.48,714.48 1415.52,714.48
  POWER w10: v1(634,1417) 659,1417 708,1466 ; 867.79,888.79 868,889 ; 1325,804.73 1361.86,767.88 ; 1850,677 1853,674 v1(1925,674) ; 1850,776 v1(1925.5,776)
  POWER w15: 213.43,841.88 218,846.46 ; 370.91,846.36 371,846.46 ; v3(867.79,860.21) 867.79,888.79 ; v1@1219.16,831 1222.16,834 1318.36,834 v3(1322,830.36) v1@1322,729.04 ; 1421,709 1467,709 1477,719 v1(1477,729)
  POWER w20: v1(351,1784) 402,1784 445,1741 445,1619 ; 370,1138 372,1140 v2(372,1206) ; v4(452.77,1479.77) v4@452.77,1483.07 ; v3(633,810) 718,810 766,858 781,858 812,889 868,889 911,889 ; v3(810.7,1011.79) 810.7,988.3 841,958 899.28,958 ; v4(835,1449) 862,1422 887,1422 916,1393 v5(937.5,1393) ; v3(899.28,986.2) 899.28,958 ; 911,908 983,836 983,797 ; v3(947,811) 958,822 ; 958,800 958,822 ; 958,833.5 958,822 ; 983,785 983,797 ; v2(1147,1534) 1129,1534 1098,1565 1098,1707 1130,1739 v2(1149,1739) ; pad.@1161,1813 1149,1801 1149,1768 v2(1149,1739) ; 1415,1623 1415,1708 1384,1739 v2(1149,1739) ; 1480,739 1513,772 1546,772 1608,710 1608,672 v1(1599,663) 1599,555 1751,555 v1(1794,512) 1850,568 1850,677 1850,776 1850,964.17 JK4.1@1909.45,1023.62 ; 1727,1584 1789.16,1521.85 v4(1789.16,1457) ; 899.28,958 899.28,900.72 911,889 ; 911,889 941,859 v3(941,852) 951,852 958,845 958,822 ; 958,822 983,797
  POWER w25: 958,800 972,786 972,633 972,609
  POWER w30: v1(174.05,846.46) 218,846.46 v1(252.8,846.46) v1(331.53,846.46) 371,846.46 v1(410.28,846.46) 504.54,846.46 505,846 ; v1(213.43,531.5) 213.43,554.57 174.05,593.94 v1(174.05,610.24) 174.05,627.06 196.61,649.61 v1(252.8,649.61) v1(331.53,649.61) 364.93,683 ; v1(213.43,767.72) 213.43,841.88 ; v1(370.91,531.5) 370.91,550.9 410.28,590.27 v1(410.28,610.24) ; v1(370.91,767.72) 370.91,846.36 ; v4(703,1566) 686,1566 ; v4(835,1449) 831,1449 792,1488 757,1488 735,1466 708,1466 686,1488 686,1566 ; 1098,1707 1000,1707 871,1836 v4(857,1836) 851,1836 720,1705 v4(720,1668) 711,1668 664,1621 664,1588 686,1566
  POWER w40: v4@452.77,1483.07 446.84,1489 384,1489 372,1477 ; 505,846 505,1051 418,1138 370,1138 305,1138 225,1218 225,1330 372,1477 ; 662,1619 445,1619 372,1546 372,1477 ; 845,633 972,633
  Bottom Layer w10: JK11.37@367.2,1285 367.2,1231.8 C38.2@372,1227 ; C37.1@372,1186 372,1177 413,1136 476,1136 498,1158 498,1190 512,1204 577,1204 593,1188 593,1141 613,1121 654,1121 664,1131 664,1159 683,1178 836,1178 R32.2@869,1211 ; C67.2@861,874 861,867 v3(867.79,860.21) ; v3(941,852) 944,849 C65.2@956,849 ; C7.1@1187,703 1193,703 1218.48,728.48 v3(1219.16,728.48) ; JK7.1@1429.79,1578 1429.79,1609.79 v2(1432,1612) ; R53.2@1839,705 1870,674 v1(1925,674) ; R54.2@1839,828 1891,776 v1(1925.5,776)
  Bottom Layer w15: C81.2@174,624 v1(174.05,610.24) v1(174.05,610.24) ; v1(213.43,531.5) v1@214,530.92 ; v1(213.43,767.72) 214,767.14 C77.2@214,740 ; v1(252.8,649.61) 253.19,650 C83.2@267,650 ; C84.2@318,650 331.14,650 v1(331.53,649.61) ; v1(370.91,531.5) 371,531.4 C80.2@371,517 ; v1(370.91,767.72) 370.91,740.1 C78.2@371,740 ; C82.2@410,624 410,610.51 v1(410.28,610.24) ; v1(410.28,846.46) 410.28,827.72 C76.2@411,827 ; C64.2@798,898 798,892.6 v3(804.8,885.8) ; v3(947,811) 958,811 C66.2@961,808 ; v1(1219.16,830.84) 1222.32,834 C9.2@1232,834 ; v1(1477,729) 1482,729 C10.2@1493,718
  Bottom Layer w20: C73.1@174,827 174,846.4 v1(174.05,846.46) ; v1(252.8,846.46) 253,846.25 C74.1@253,828 ; C75.2@332,827 v1@332,845.99 ; C37.1@372,1186 v2(372,1206) C38.2@372,1227 ; v4(452.77,1479.77) 470,1497 C22.1@481,1497 C23.1@522,1497 522,1488.54 v4(530.77,1479.77) ; C56.1@589,275 590,276 v2(610,276) ; v3(633,810) C68.2@647,810 ; v3@811,1012.09 C63.2@811,1025 ; C62.2@898,972 898,984.22 v3@899.28,985.5 ; FB2.2@1429,505 1464,505 v1(1480,489) ; C16.1@1607,731 C18.2@1607,690 1607,671 v1(1599,663) 1599,657 1613,643 C17.2@1645,643
  Bottom Layer w40: v4(390,971) U16.1@510,851
  other v4: 411,950
VRTC: C19.2 R14.1 U1.M9 | length 468.6
  Top Layer w5: v1(1321,652) v1@1321,652.23
  Top Layer w10: U1.M9@1308.72,664.5 v1@1321,652.23
  POWER w10: v1(1321,652) 1339,634 1488,634 1560,562 1590,532 1614,532 v2(1622,524)
  Bottom Layer w10: v1(1321,652) 1345,628 C19.2@1345,617
  Bottom Layer w20: R14.1@1577,541 1605,541 v2(1622,524)
VUSB1: C59.2 JK1.1 R6.2 R35.2 U7.4 U7.5 U12.5 U13.1 | length 3119.8
  Top Layer w6: v4(1605,408) 1619,408 1656,445 1656,525 R35.2@1660,529
  Top Layer w16: JK1.1@1562.99,157.48 JK1.1@1562.99,130.99 ; 1602,112 v4@1544,112 ; v4(1614,100) 1605,109 1579,109 ; v4@1544,112 v4(1535,112) 1538,109 1579,109 ; v4@1544,112 JK1.1@1562.99,130.99 ; JK1.1@1562.99,130.99 1562.99,125.01 1579,109
  Top Layer w20: R6.2@1360,205 v4@1360,228.4
  Top Layer w30: U7.5@1258,393 1288,393 v4(1298,383) v4(1298,412) 1272,412 ; U13.1@1605,364 v4(1605,408)
  Top Layer w40: U7.5@1258,398 U7.4@1258,430 1258,442 1279,463 1312,463 1323,474 1422,474 U12.5@1432,464 v4(1457,464)
  POWER w5: v4(1298,412) 1267,412 1245,390 1245,330 1227,312 1053,312 1037,296 1037,259 1052,244 1117,244 1132,229 v4(1360,229)
  POWER w30: v4(1457,464) 1457,435 1484,408 v4(1605,408) ; v4(1535,112) 1547,100
  POWER w40: v4@1298,390 v4(1298,412) ; v4@1298,396 1277,375 1277,339 1294,322 1365,322 1371,328 1905.5,328 1940.5,293 1940.5,249.5 1904,213 1674,213 1614,153 v4(1614,100) 1547,100
  Bottom Layer w30: v4@1538,112 1602,112 v4(1614,100)
VUSB2: JK2.1 U14.1 | length 308
  Top Layer w16: v4(1086,198) JK2.1@1098.43,185.57 ; v4@1086,204 v4(1101,219) ; JK2.1@1098.43,157.48 JK2.1@1098.43,185.57 ; v4@1107,213 1107,202 1098.43,193.43 JK2.1@1098.43,185.57
  POWER w30: v4(923,213) 929,219 v4(1101,219) ; 1065,219 v4(1086,198)
W\A\K\E\U\P\: JK8.14 K2.2 K2.4 U1.L6 | length 1170.6
  Top Layer w5: U1.L6@1231.95,690.09 v1(1241.3,680.75)
  Top Layer w8: K2.2@669.26,120.5 K2.4@826.74,120.5 866.54,80.71 JK8.14@866.54,39.37
  Bottom Layer w4: JK8.14@866.54,39.37 866.54,67.54 885,86 906,86 1020,200 1020,284 1055,319 1114,319 1135,340 1209,340 1245,376 1245,434 1260,449 1260,570 1255,575 1255,667.05 v1(1241.3,680.75)
W\D\O\G\: JK9.17 R10.2 U1.D14 | length 1466
  Top Layer w5: JK9.17@1019.88,1929.13 1056.02,1893 1101,1848.02 1101,1799 1128,1772 1306,1772 1322,1788 1351,1788 1394,1745 1394,1230 1467,1157 1467,1127 1494,1100 1494,1029 R10.2@1514,1009 1512,1007 1512,917 1468,873 1453,873 1449.23,869.23 U1.D14@1436.68,869.23
pads on no net: JK2.4 JK6. JK11.1 JK11.2 JK11.3 JK11.4 JK11.6 JK11.@209.72,1363.74 U1.N10 U1.N12 U1.N13 U1.P13 U2.E2 U5.6 U5.7 U9.A1 U9.A2 U9.A9 U9.A10 U9.B1 U9.B10 U9.D2 U9.D3 U9.D4 U9.D5 U9.D6 U9.D7 U9.D8 U9.D9 U9.E2 U9.E3 U9.E5 U9.E6 U9.E7 U9.E8 U9.E9 U9.H4 U9.H5 U9.H6 U9.H7 U9.J2 U9.J3 U9.J4 U9.J5 U9.J6 U9.J7 U9.J8 U9.J9 U9.K4 U9.K5 U9.K6 U9.K7 U9.K8 U9.K9 U9.L5 U9.L6 U9.M2 U9.M3 U9.M6 U9.M8 U9.M9 U9.N4 U9.N5 U9.N6 U9.N7 U9.N8 U9.N9 U9.P4 U9.P7 U9.T1 U9.T10 U9.U1 U9.U2 U9.U9 U9.U10 U11.8 U11.19 U11.22 U11.26 U11.27 X1.0
copper on no net:
  other v4: 0,0

## Polygon pours and split planes (outlines as drawn)
GND on GND "Bottom GND" (solid, remove dead copper, pour order 2): 7,1771 130,1771 165,1771 167,1771 173,1777 188,1792 188,1821 227,1821 366,1821 367,1820 437,1750 437,1675 445,1675 445,1750 445,1755 411,1789 368,1832 195,1832 195,1957 194,1958 199,1963 1760,1963 1760,1885 1307,1885 1305,1887 1306,1886 1306,1738 1307,1737 1417,1737 1418,1736 1418,1449 1418,1395 1430,1383 1554,1259 1554,1047 1554,1036 1563,1036 1563,1264 1556,1271 1428,1399 1428,1455 1428,1744 1426,1746 1419,1753 1321,1753 1321,1869 1633,1869 1732,1869 1754,1847 1766,1835 1766,1800 1770,1800 1797,1773 1810,1760 1913,1760 1963,1760 1963,1733 1963,1106 1736,1106 1736,1094 1737,1093 1963,1093 1963,190 1963,54.17 1925.03,16.19 1910.83,2 967,2 965,4 195,4 194,3 194,121 194,139 136,197 5,197 5,1769 7,1771
VDIO on POWER "Bottom GND" (solid, remove dead copper, pour order 3): 187,1964 187,1816 149,1778 148,1777 5,1777 5,195 129,195 143,195 174,164 194,144 194,3 1909,3 1937,31 1967.08,61.08 1967.08,79.13 1967.08,1773.92 1966,1775 1833,1775 1818,1775 1796,1797 1773,1820 1773,1890 1773,1964 1772,1963 187,1963

## Keep-outs
Keep-Out Layer:
  the board outline again, w8

## Other copper
Top Layer:
  rectangle net VD1.2: 1043,482 1075,541
  rectangle net VD1.2: 992,494 1002,508
  rectangle net NetL3_1: 947,487 969,518
  rectangle net GND: 1345,387 1385,442
POWER:
  rectangle net VDIO: 958,811 981,845
  rectangle net VDIO: 1391,715 1403,721
  rectangle net VDIO: 1410,699 1424,714.48
  rectangle net VDIO: 1392.49,832 1403,842.43

## Silkscreen, mask and mechanical layers (free items; w line width, h text height)
Top Overlay:
  text "3V" at 1128,1847 h30
  text "ShareBoard" at 668,1162 h50
  text "ShareBoard-i.MXRT1050_REV3" at 666,1109 h30
  text "GND" at 1777,132 h30 r45
Bottom Overlay:
  text "5V" at 1120,309 h30